# Altium PCB LedLampDriver_v2.PcbDoc
Units mm, origin at the board's own origin, x right, y up, seen from the top; angles counter-clockwise.
Board outline 152.4 x 101.6 mm, 2 copper layers (Top Layer, Bottom Layer); 21 components, 9 nets, 47 pads, 2 vias.
Unrouted connection lines stored in the file: 14.
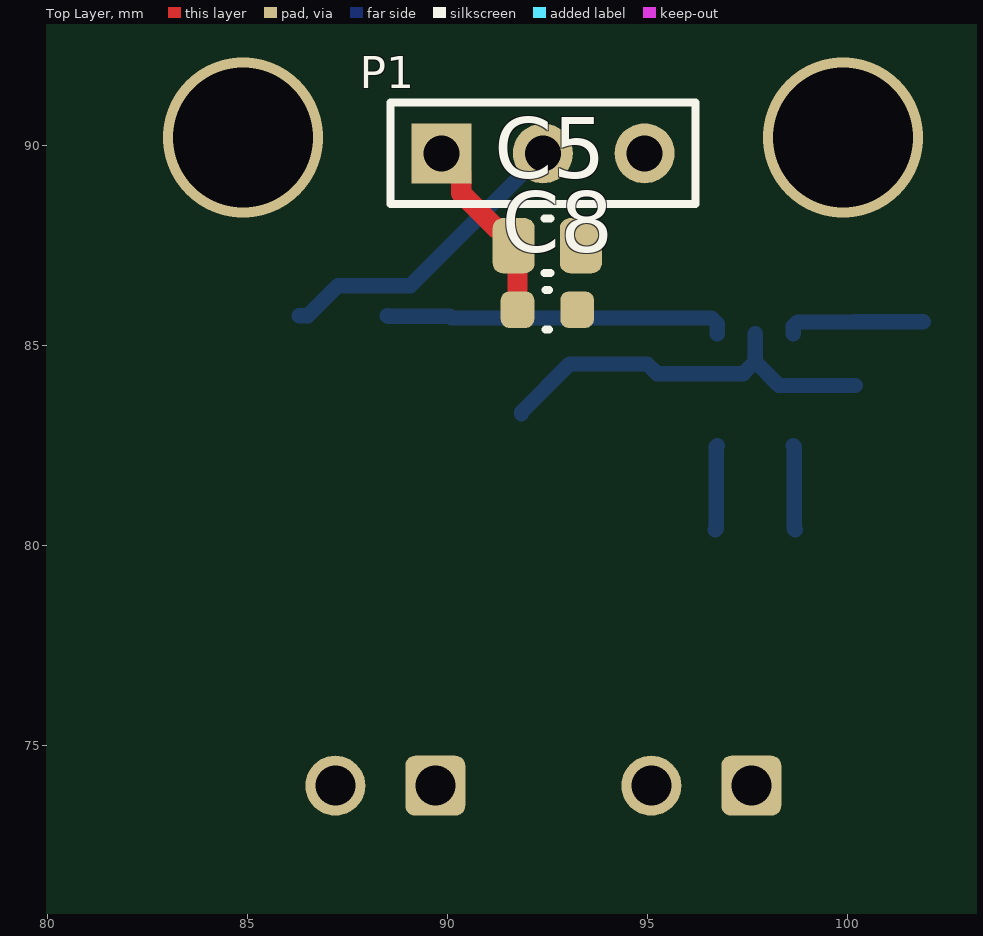
[diagram p0: Top Layer view]
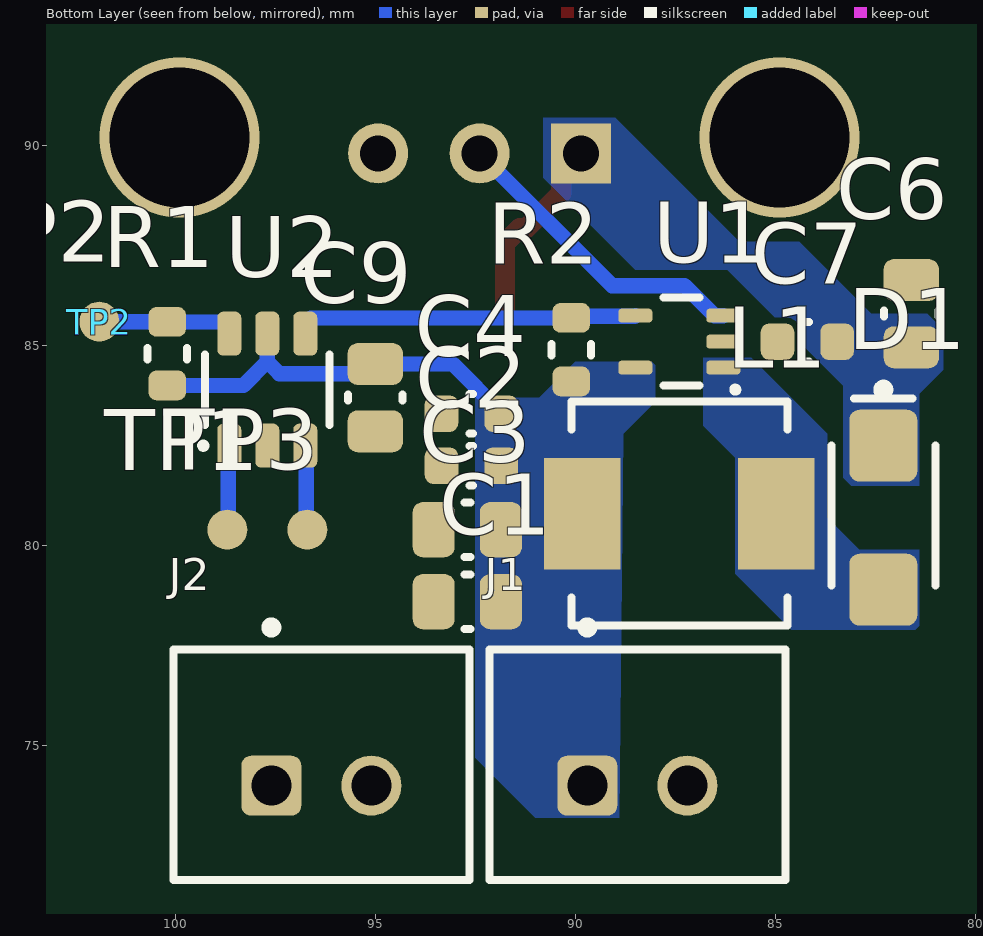
[diagram p1: Bottom Layer view, seen from below]
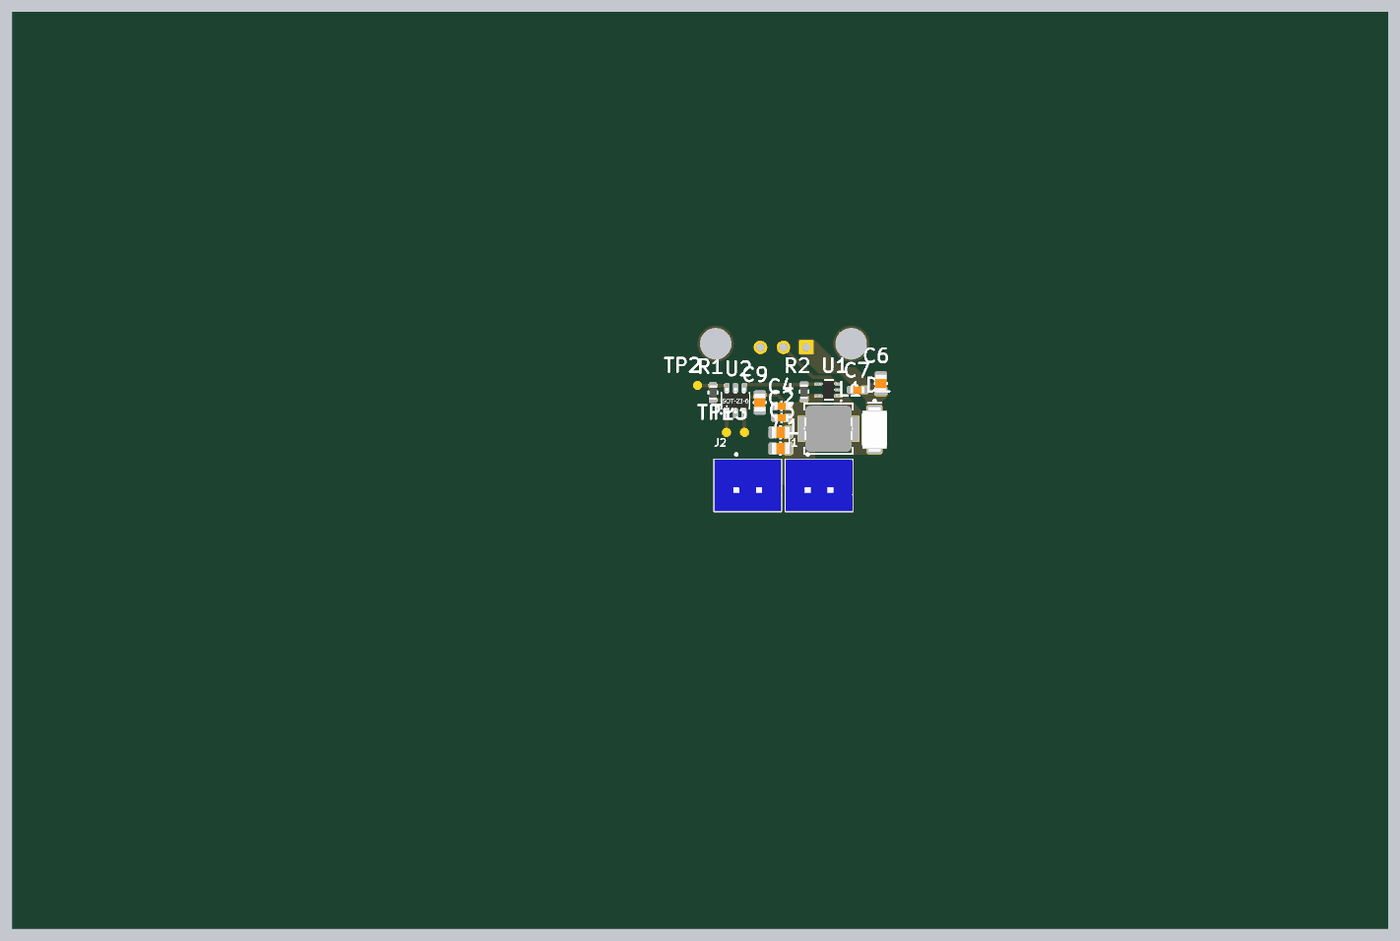
[diagram p2: 3D render of the assembled board from below, using the file's embedded part models]

## Layer stack, top to bottom
Top Solder: solder mask 0.0102, Solder Resist, Dk 3.5
Top Layer: signal copper 0.0356
Dielectric 1: dielectric 0.32, FR-4, Dk 4.8
Bottom Layer: signal copper 0.0356
Bottom Solder: solder mask 0.0102, Solder Resist, Dk 3.5

## Board outline
25.4,25.4 177.8,25.4 177.8,127 25.4,127

## Design rules (kind name [scope] priority, off if disabled: settings)
Clearance [All] p1: gap=0.15 ignorepadtopadclearanceinfootprint=FALSE except(0: Arc-Hole Track-Hole SMDPad-Hole THPad-Hole Via-Hole Fill-Hole Poly-Hole Region-Hole Text-Hole)
HoleSize [All] p1: absolutevalues=TRUE maxlimit=6.3 minlimit=0.2 maxpercent=80.000 minpercent=20.000
MinimumSolderMaskSliver [All] p1: minsoldermaskwidth=0.15
PlaneConnect [All] p1: planeconnectstyle=Direct reliefexpansion=0.508 reliefentries=4 reliefconductorwidth=0.254 reliefairgap=0.254
PolygonConnect [All] p1: connectstyle=Direct reliefconductorwidth=0.254 reliefentries=4 polygonreliefangle="90 Angle" airgapwidth=0.254
RoutingVias [All] p1: holewidth=0.6 width=0.35 viastyle="Through Hole" minholewidth=0.35 minwidth=0.3 maxholewidth=1.7 maxwidth=1.5
SilkToSilkClearance [All] p1: silktosilkclearance=0.15
SilkToSolderMaskClearance [IsPad] p1: minsilkscreentomaskgap=0.08 clearancetoexposedcopper=TRUE
SolderMaskExpansion [All] p1: expansion=0.045 istentingtop=FALSE
Width [All] p1: maxlimit=1.524 minlimit=0.203 preferedwidth=0.254 minimp=50.000000 maximp=50.000000 favimp=50.000000
25 further rules are at their usual default settings.

## Components (designator, comment, footprint, x,y, rotation, side; value= is the part's Value field where it differs from the comment)
C1 "10u" C0805_N 92.7,78.6 r0 bottom
C2 "10u" C0603_N 92.6,82 r0 bottom
C3 "100n" C0805_N 92.7,80.4 r0 bottom
C4 "100n" C0603_N 92.6,83.3 r0 bottom
C5 "10u" C0805_N 92.5,87.5 r0 top
C6 "10u" C0805_N 81.6,85.8 r90 bottom
C7 "1u" C0603_N 84.2,85.1 r0 bottom
C8 "100n" C0603_N 92.5,85.9 r0 top
C9 "100n" C0805_N 95,83.7 r270 bottom
D1 "DIODE" DO-214AC 82.3,80.7 r270 bottom
J1 "" B2B-XH-A 89.7,74 r180 bottom
J2 "" B2B-XH-A 97.6,74 r180 bottom
L1 "4.7u" IHLP2020 87.4,80.8 r180 bottom
P1 "Header 3" HDR1X3 89.851,89.81 r0 top locked
R1 "10k" R0603_N 100.2,84.8 r90 bottom
R2 "DNP" R0603_N 90.1,84.9 r90 bottom
TP1 "TP" TP_1MM 98.7,80.4 r90 bottom
TP2 "TP" TP_1MM 101.9,85.6 r90 bottom
TP3 "TP" TP_1MM 96.7,80.4 r90 bottom
U1 "TPS61169" SC70 87.4,85.1 r90 bottom
U2 "PIC10F200" SOT23-6 97.7,83.9 r180 bottom

## Footprints (in the part's own frame and the unit in brackets; to place one, negate y for a bottom-side part, rotate by r counter-clockwise, add the part's x,y. Pads: shape width x height; smd on the part's side, far side on the other; paste and mask are expansions set on the pad)
B2B-XH-A [mm] "Header, Vertical, 2.50 mm pitch; 0.70 mm lead width, 5 pins, 1 row, 5 pins per row, 14.90 mm L X 5.75 mm W X 7.00 mm H body"
  rrect33% 1.5x1.5 / inner round 1.5 / far side rrect33% 1.5x1.5 hole 1 paste-1.5: 1(0,0)
  round 1.5 hole 1 paste-1.5: 2(2.5,0)
  silkscreen extent -2.45,-2.35 4.95,4.08, body extent -2.45,-2.35 4.95,3.4, height 7.05
C0603_N [mm] "Capacitor, Chip; 1.60 mm L X 0.80 mm W X 0.87 mm H body"
  rrect50% 0.84x0.91 smd: 1(-0.745,0) 2(0.745,0)
  silkscreen extent -0.05,-0.49 0.05,0.49, body extent -0.8,-0.4 0.8,0.4, height 0.87
C0805_N [mm] "Capacitor, Chip; 2.00 mm L X 1.25 mm W X 1.35 mm H body"
  rrect48% 1.05x1.38 smd: 1(-0.84,0) 2(0.84,0)
  silkscreen extent -0.08,-0.68 0.08,0.68, body extent -1,-0.63 1,0.62, height 1.35
DO-214AC [mm] "SMA"
  rrect30% 1.8x1.7 smd: A(1.8,0) C(-1.8,0)
  silkscreen extent -3.32,-1.3 1.7,1.3, body extent -2.55,-1.33 2.55,1.34, height 2.17
HDR1X3 [mm] "Connector; Header; 3 Position"
  rect 1.5x1.5 hole 0.9: 1(0,0)
  round 1.5 hole 0.9: 2(2.54,0) 3(5.08,0)
  silkscreen extent -1.27,-1.27 6.35,1.27
IHLP2020 [mm] "Inductor, 5.18mm L X 5.18mm W X 3 mm H body"
  rect 1.905x2.79 smd: 1(-2.425,0) 2(2.425,0)
  silkscreen extent -2.7,-2.8 2.7,2.8, body extent -2.73,-2.57 2.73,2.57, height 2.84
R0603_N [mm] "Resistor, Chip; 1.60 mm L X 0.80 mm W X 0.55 mm H body"
  rrect51% 0.74x0.93 smd: 1(-0.795,0) 2(0.795,0)
  silkscreen extent -0.15,-0.49 0.15,0.49, body extent -0.8,-0.4 0.8,0.4, height 0.55
SC70 [mm] "5 pin"
  rrect49% 0.35x0.85 smd: 1(-0.65,-1.1) 2(0,-1.1) 3(0.65,-1.1) 4(0.65,1.1) 5(-0.65,1.1)
  silkscreen extent -1.27,-1.47 1.1,0.4, body extent -1,-1.05 1,1.05, height 0.95
SOT23-6 [mm] "Small Outline Transistor (SOT23), 0.95 mm pitch; 6 pin"
  rrect49% 0.6x1.1 smd: 1(-0.95,-1.4) 2(0,-1.4) 3(0.95,-1.4) 4(0.95,1.4) 5(0,1.4) 6(-0.95,1.4)
  silkscreen extent -1.68,-1.48 1.56,0.88, body extent -1.5,-1.4 1.5,1.4, height 0.86
TP_1MM [mm]
  round 1 smd paste-100 mask+0: 1(0,0)

## Part data
C1 C2 C3 C4 C5 C6 C7 C8 C9: library part CAP, RevS="$Rev:: 58        $"
J1 J2: library part PINHDR_2X1, "Socket", ComponentLink1Description=Manufacturer, ComponentLink1URL=http://www.we-online.de, ComponentLink2Description=Datasheet, ComponentLink2URL=http://katalog.we-online.de/em/datasheet/691412320002.pdf
L1: library part IND, "Inductor"
P1: "Header, 3-Pin", LatestRevisionDate=17-Jul-2002, LatestRevisionNote="Re-released for DXP Platform.", Publisher="Altium Limited"
R1 R2: library part RES
U1: "38V High Current-Boost WLED Driver"
U2: "6-Pin, 8-Bit Flash MCU"

## Via types
v1: diameter 4, hole 3.5, Top Layer to Bottom Layer, tented both sides, 2 vias

## Nets (pads, with @x,y where several pads share a name; then routed paths per layer and width w, separated by ;. In a path a pad name is that pad's centre, name@x,y a point inside that pad or via, vN(x,y) a via of type N, cw(c..) or ccw(c..) an arc to the next point about the centre after c; other vN are vias at no path point)
CTRL: R2.2 U1.4 U2.4 | length 8.6
  Bottom Layer w0.381: U1.4 88.515,85.735 90.06,85.735 R2.2 96.605,85.695 96.75,85.55 U2.4
FB: P1.2 U1.3 | length 7.8
  Bottom Layer w0.381: U1.3 86.519,85.75 87.269,86.5 89.081,86.5 P1.2
GND: C1.2 C2.2 C3.2 C4.2 C5.2 C6.2 C7.2 C8.2 C9.2 J1.2 J2.2 P1.3 U1.2 U2.2
NetD1_A: D1.A L1.2 U1.1
NetTP1_1: TP1.1 U2.1 | length 2.1
  Bottom Layer w0.381: U2.1 98.675,82.475 98.675,80.425 TP1.1
NetTP3_1: TP3.1 U2.3 | length 2.1
  Bottom Layer w0.381: TP3.1 96.725,80.425 96.725,82.475 U2.3
SW: J2.1 R1.2 TP2.1 U2.6 | length 3.5
  Bottom Layer w0.381: U2.6 98.65,85.486 98.76,85.595 R1.2 100.202,85.597 101.898,85.597 TP2.1
Vin: C1.1 C2.1 C3.1 C4.1 C9.1 J1.1 L1.1 R1.1 R2.1 U1.5 U2.5 | length 10
  Bottom Layer w0.381: C4.1 91.855,83.335 93.06,84.54 C9.1 95.24,84.3 97.4,84.3 97.7,84.6 ; U2.5 97.7,84.6 ; R1.1 98.295,84.005 97.7,84.6
Vout: C5.1 C6.1 C7.1 C8.1 D1.C P1.1 | length 4.8
  Top Layer w0.508: P1.1 90.347,89.314 90.347,88.813 91.224,87.936 91.389,87.936 91.755,87.57 C8.1
copper on no net:
  other v1: 84.891,90.21 99.891,90.21

## Polygon pours and split planes (outlines as drawn)
Vout on Bottom Layer "VOUT_L02_P002" (solid, pour order 2): 83.1,81.5 83.3,81.7 83.3,84 84.1,84.8 86.2,86.9 88.5,86.9 90.8,89.2 90.8,90.7 89,90.7 88.3,90 85.9,87.6 84.4,87.6 82.6,85.8 81.2,85.8 80.8,85.4 80.8,84.4 81.4,83.8 81.4,81.5
NetD1_A on Bottom Layer "NETD1_A_L02_P001" (solid, pour order 1): 86.8,84.7 85.6,84.7 83.7,82.8 83.7,80.7 82.9,79.9 81.4,79.9 81.4,78 81.5,77.9 84.6,77.9 86,79.3 86,82.2 86.8,83
Vin on Bottom Layer "VIN_L02_P000" (solid, pour order 0): 88.9,73.2 91,73.2 92.5,74.7 92.5,83.7 90.9,83.7 90,84.6 88,84.6 88,83.6 88.8,82.8

## Silkscreen, mask and mechanical layers (free items; w line width, h text height)
Mechanical 1:
  lines w0.2: 80.4,71.21 80.4,92.71 104.4,92.71 104.4,71.21 80.4,71.21